# EAGLE board Ffrydiau_core1.1 (EAGLE 9.6.2)

Size 100 x 49 mm. Coordinates in mm from the lower left corner, seen from the top.
Outline: 0,0 100,0 100,49 0,49 0,0
Copper layers (1*16): Top 0.035mm / dielectric 1.5mm / Bottom 0.035mm
Design rules "default": minimum track width 6mil, minimum drill 0.35mm, track to track 6mil, track to pad 6mil, pad to pad 6mil, via to via 6mil, smd to smd 6mil, copper to edge 40mil, drill to drill 6mil, minimum pad ring 10mil, minimum via ring 8mil, stop-mask expansion 4mil, vias tented up to drill 0mil, thermal gap 10mil

## Footprints (pad centres in the part's own frame; a part is rotated, then mirrored left to right if it is on the bottom)
C050-025X075 = drill 0.813 octagon: 1 -2.54,0; 2 2.54,0
1X01 = drill 1.016 pad 1.88: 1 0,0
1X02 = drill 1.016 pad 1.88: 1 0,0; 2 2.54,0
3,2 = hole 3.2: 0,0
DIL14 = drill 0.813 long: 1 -7.62,-3.81; 2 -5.08,-3.81; 3 -2.54,-3.81; 4 0,-3.81; 5 2.54,-3.81; 6 5.08,-3.81; 7 7.62,-3.81; 8 7.62,3.81; 9 5.08,3.81; 10 2.54,3.81; 11 0,3.81; 12 -2.54,3.81; 13 -5.08,3.81; 14 -7.62,3.81
DIL16 = drill 0.813 long: 1 -8.89,-3.81; 2 -6.35,-3.81; 3 -3.81,-3.81; 4 -1.27,-3.81; 5 1.27,-3.81; 6 3.81,-3.81; 7 6.35,-3.81; 8 8.89,-3.81; 9 8.89,3.81; 10 6.35,3.81; 11 3.81,3.81; 12 1.27,3.81; 13 -1.27,3.81; 14 -3.81,3.81; 15 -6.35,3.81; 16 -8.89,3.81
DIL08 = drill 0.813 long: 1 -3.81,-3.81; 2 -1.27,-3.81; 3 1.27,-3.81; 4 3.81,-3.81; 5 3.81,3.81; 6 1.27,3.81; 7 -1.27,3.81; 8 -3.81,3.81
1X03 = drill 1.016 pad 1.88: 1 0,0; 2 2.54,0; 3 5.08,0
TO92 = drill 0.813 octagon: 1 1.27,0; 2 0,1.905; 3 -1.27,0
0207/7 = drill 0.813 octagon: 1 -3.81,0; 2 3.81,0
RTRIM3296W = drill 0.61: 1 0,-2.54; 2 0,0; 3 0,2.54
COMBINED_POWER = drill 1.78: GND1 -1.98,0; GND2 1.98,0; V+1 -5.94,0; V-1 5.94,0 | drill 1.016: GND3 -2.54,1.27; GND5 2.54,1.27; GND6 -2.54,-1.27; GND8 2.54,-1.27; V+2 -5.08,1.27; V+3 -5.08,-1.27; V-2 5.08,1.27; V-3 5.08,-1.27 | drill 1.016 pad 2.184: GND4 0,1.27; GND7 0,-1.27

## Placement (x,y rotation side)
C5  100nF  [C050-025X075]  -35.56,26.67 0 top  (outside the outline)
C6  100nF  [C050-025X075]  -44.45,26.67 0 top  (outside the outline)
C7  100nF  [C050-025X075]  50.8,21.59 90 top
C8  100nF  [C050-025X075]  50.8,44.45 90 top
C9  100nF  [C050-025X075]  20.32,33.02 90 top
C10  100nF  [C050-025X075]  20.32,10.16 90 top
C11  100nF  [C050-025X075]  -16.51,35.56 0 top  (outside the outline)
C12  100nF  [C050-025X075]  -25.4,35.56 0 top  (outside the outline)
C13  22pF  [C050-025X075]  -34.29,35.56 0 top  (outside the outline)
C14  22pF  [C050-025X075]  -43.18,35.56 0 top  (outside the outline)
CV1  1XWIREPAD  [1X01]  21.59,2.54 90 top
CV2  1XWIREPAD  [1X01]  19.05,2.54 90 top
EXT  2XWIREPAD  [1X02]  44.45,2.54 0 top
FLD2  1XWIREPAD  [1X01]  49.53,2.54 90 top
GND  1XWIREPAD  [1X01]  31.75,2.54 90 top
H1  MOUNT-HOLE3.2  [3,2]  95,44 0 top
H2  MOUNT-HOLE3.2  [3,2]  5,5 0 top
H3  MOUNT-HOLE3.2  [3,2]  5,44 0 top
H4  MOUNT-HOLE3.2  [3,2]  95,5 0 top
IC1  [DIL14]  85.09,25.4 180 top
IC2  [DIL16]  46.99,33.02 0 top
IC3  [DIL14]  20.32,21.59 180 top
IC4  [DIL08]  59.69,8.89 270 top
OFS1  1XWIREPAD  [1X01]  36.83,2.54 270 top
OFS2  1XWIREPAD  [1X01]  39.37,2.54 90 top
OUT  1XWIREPAD  [1X01]  41.91,2.54 270 top
POT1  3XWIREPAD  [1X03]  24.13,2.54 0 top
POT2  3XWIREPAD  [1X03]  11.43,2.54 0 top
Q1  2N3906  [TO92]  -35.56,77.47 0 top  (outside the outline)
Q2  2N3904  [TO92]  -63.5,77.47 0 top  (outside the outline)
Q3  2N3906  [TO92]  -49.53,77.47 0 top  (outside the outline)
Q4  2N3904  [TO92]  -77.47,77.47 0 top  (outside the outline)
R1  30K  [0207/7]  -19.05,40.64 0 top  (outside the outline)
R2  12K  [0207/7]  -31.75,40.64 0 top  (outside the outline)
R3  12K  [0207/7]  -44.45,40.64 0 top  (outside the outline)
R4  220K  [0207/7]  -57.15,40.64 0 top  (outside the outline)
R5  10K  [0207/7]  -69.85,40.64 0 top  (outside the outline)
R6  10K  [0207/7]  -82.55,40.64 0 top  (outside the outline)
R7  10K  [0207/7]  -19.05,45.72 0 top  (outside the outline)
R8  100K  [0207/7]  -31.75,45.72 0 top  (outside the outline)
R9  100K  [0207/7]  -44.45,45.72 0 top  (outside the outline)
R10  100K  [0207/7]  -57.15,45.72 0 top  (outside the outline)
R11  100K  [0207/7]  -69.85,45.72 0 top  (outside the outline)
R12  30K  [0207/7]  -82.55,45.72 0 top  (outside the outline)
R13  12K  [0207/7]  -19.05,50.8 0 top  (outside the outline)
R14  12K  [0207/7]  -31.75,50.8 0 top  (outside the outline)
R15  10K  [0207/7]  -44.45,50.8 0 top  (outside the outline)
R16  220K  [0207/7]  -57.15,50.8 0 top  (outside the outline)
R17  75K  [0207/7]  -69.85,50.8 0 top  (outside the outline)
R18  75K  [0207/7]  -82.55,50.8 0 top  (outside the outline)
R19  22K  [0207/7]  -19.05,55.88 0 top  (outside the outline)
R20  22K  [0207/7]  -31.75,55.88 0 top  (outside the outline)
R21  100K  [0207/7]  25.4,10.16 90 top
R22  100K  [0207/7]  27.94,10.16 90 top
R23  100K  [0207/7]  22.86,10.16 90 top
R24  100K  [0207/7]  25.4,33.02 270 top
R25  100K  [0207/7]  27.94,33.02 270 top
R26  100K  [0207/7]  15.24,10.16 90 top
R27  100K  [0207/7]  17.78,10.16 90 top
R28  100K  [0207/7]  12.7,10.16 90 top
R29  100K  [0207/7]  15.24,33.02 270 top
R30  100K  [0207/7]  12.7,33.02 270 top
R31  5K7  [0207/7]  -19.05,66.04 0 top  (outside the outline)
R32  5K7  [0207/7]  -31.75,66.04 0 top  (outside the outline)
R33  15K  [0207/7]  -44.45,66.04 0 top  (outside the outline)
R34  10K  [RTRIM3296W]  -38.1,17.78 0 top  (outside the outline)
R35  10K  [RTRIM3296W]  -48.26,17.78 0 top  (outside the outline)
R36  15K  [0207/7]  -57.15,66.04 0 top  (outside the outline)
R37  47K  [0207/7]  25.4,43.18 0 top
R38  47K  [0207/7]  15.24,40.64 180 top
R39  47K  [0207/7]  25.4,40.64 180 top
R40  47K  [0207/7]  -31.75,71.12 0 top  (outside the outline)
R41  10K  [0207/7]  -44.45,71.12 0 top  (outside the outline)
R42  47K  [0207/7]  15.24,43.18 0 top
R43  47K  [0207/7]  -69.85,71.12 0 top  (outside the outline)
R44  10K  [0207/7]  -82.55,71.12 0 top  (outside the outline)
R45  100Ω  [0207/7]  -19.05,76.2 0 top  (outside the outline)
R46  10K  [RTRIM3296W]  -92.71,2.54 0 top  (outside the outline)
R47  10K  [RTRIM3296W]  -102.87,2.54 0 top  (outside the outline)
SIG  1XWIREPAD  [1X01]  34.29,2.54 90 top
TP1  1XWIREPAD  [1X01]  -36.83,88.9 0 top  (outside the outline)
TP2  1XWIREPAD  [1X01]  -45.72,88.9 0 top  (outside the outline)
WP1  COMBO_SUPPLY_HEADER  [COMBINED_POWER]  3.81,25.4 270 top

## Library data of the parts
C5-C14 = rcl; SPICEPREFIX: C
CV1 CV2 EXT FLD2 GND OFS1 OFS2 OUT POT1 POT2 SIG TP1 TP2 WP1 = ElectricNoodleBox
H1-H4 = holes
IC1 IC3 = ElectricNoodleBox; CATALOGUE: 3005140; RETAILER: Farnell
IC2 = ElectricNoodleBox; CATALOGUE: 3118206; RETAILER: Farnell
IC4 = ElectricNoodleBox; CATALOGUE: 1103189; RETAILER: Farnell
Q1 Q3 = transistor-pnp
Q2 Q4 = transistor-npn
R1-R33 R36-R45 = rcl; SPICEPREFIX: R
R34 R35 R46 R47 = rcl; SPICEMODEL: X; SPICEPREFIXL: POT

## Nets
+12V: C6.1 C8.1 C9.1 C12.1 IC1.4 IC2.11 IC3.4 IC4.8 POT1.3 POT2.3 R2.2 R13.2 R31.1 R32.1 WP1.V+1 WP1.V+2 WP1.V+3
-12V: C5.2 C7.2 C10.2 C11.2 IC1.11 IC2.6 IC3.11 IC4.4 POT1.1 POT2.1 R3.1 R14.1 R37.1 R42.1 WP1.V-1 WP1.V-2 WP1.V-3
AGND: C5.1 C6.2 C7.1 C8.2 C9.2 C10.1 C11.1 C12.2 GND.1 IC1.3 IC1.5 IC1.10 IC1.12 IC3.3 IC3.5 IC3.10 IC3.12 IC4.3 IC4.5 R19.1 R20.1 R34.2 R35.2 R41.2 R44.2 WP1.GND1 WP1.GND2 WP1.GND3 WP1.GND4 WP1.GND5 WP1.GND6 WP1.GND7 WP1.GND8
N$1: Q1.2 Q2.2 R1.2 R40.1
N$2: Q1.3 R2.1 R46.3
N$3: Q2.3 R3.2 R46.1
N$4: Q1.1 Q2.1 R5.2 R46.2
N$5: IC1.9 R4.2 R5.1
N$6: IC1.8 R4.1 R6.2
N$7: IC1.13 R6.1 R7.2
N$8: OUT.1 R45.1
N$9: C13.2 IC4.1 R1.1 R17.2 TP1.1
N$13: IC1.2 R8.2 R9.1 R10.1 R11.1
N$14: IC1.1 R8.1 R45.2
N$15: Q3.2 Q4.2 R12.2 R43.1
N$16: Q3.3 R13.1 R47.3
N$17: Q4.3 R14.2 R47.1
N$18: Q3.1 Q4.1 R15.2 R47.2
N$19: IC1.6 R15.1 R16.2
N$20: FLD2.1 IC1.7 R11.2 R16.1
N$21: C14.1 IC2.12 IC4.6 R18.1 R20.2
N$22: C13.1 IC2.5 IC4.2 R17.1 R19.2
N$23: C14.2 IC4.7 R12.1 R18.2 TP2.1
N$24: IC3.13 R21.2 R22.1 R23.2
N$25: IC3.14 R22.2 R24.1
N$26: IC3.2 R24.2 R25.1
N$27: IC3.1 R25.2 R39.2
N$28: CV2.1 R27.1
N$29: IC3.7 R30.2 R38.2
N$30: POT1.2 R21.1
N$31: IC3.6 R29.2 R30.1
N$32: CV1.1 R23.1
N$33: IC3.8 R28.2 R29.1
N$34: IC3.9 R26.2 R27.2 R28.1
N$35: IC2.14 R35.3 R36.2
N$36: IC2.13 R35.1
N$37: IC2.15 R31.2
N$38: IC2.2 R32.2
N$39: IC2.1 R37.2 R39.1
N$40: POT2.2 R26.1
N$41: IC2.3 R33.2 R34.3
N$42: IC2.4 R34.1
N$43: IC2.16 R38.1 R42.2
N$44: OFS1.1 R40.2 R41.1
N$45: OFS2.1 R43.2 R44.1
N$47: EXT.2 R36.1
SIGIN: R9.2 R33.1 SIG.1
STAGE1OUT: EXT.1 IC1.14 R7.1 R10.2

## Tracks (layer width: path | path; a pad name or v marks a point on that pad's centre or on a via)
+12V  (16 unrouted)
-12V  (16 unrouted)
AGND  (32 unrouted)
N$1  (3 unrouted)
N$2  (2 unrouted)
N$3  (2 unrouted)
N$4  (3 unrouted)
N$5  (2 unrouted)
N$6  (2 unrouted)
N$7  (2 unrouted)
N$8  (1 unrouted)
N$9  (4 unrouted)
N$13  (4 unrouted)
N$14  (2 unrouted)
N$15  (3 unrouted)
N$16  (2 unrouted)
N$17  (2 unrouted)
N$18  (3 unrouted)
N$19  (2 unrouted)
N$20  (3 unrouted)
N$21  (4 unrouted)
N$22  (4 unrouted)
N$23  (4 unrouted)
N$24  (3 unrouted)
N$25  (2 unrouted)
N$26  (2 unrouted)
N$27  (2 unrouted)
N$28  (1 unrouted)
N$29  (2 unrouted)
N$30  (1 unrouted)
N$31  (2 unrouted)
N$32  (1 unrouted)
N$33  (2 unrouted)
N$34  (3 unrouted)
N$35  (2 unrouted)
N$36  (1 unrouted)
N$37  (1 unrouted)
N$38  (1 unrouted)
N$39  (2 unrouted)
N$40  (1 unrouted)
N$41  (2 unrouted)
N$42  (1 unrouted)
N$43  (2 unrouted)
N$44  (2 unrouted)
N$45  (2 unrouted)
N$47  (1 unrouted)
SIGIN  (2 unrouted)
STAGE1OUT  (3 unrouted)